# Altium PCB ADC.PcbDoc
Units mm, origin at the board's own origin, x right, y up, seen from the top; angles counter-clockwise.
Board outline 76.2 x 30.48 mm, 2 copper layers (Top Layer, Bottom Layer); 55 components, 39 nets, 152 pads, 22 vias.
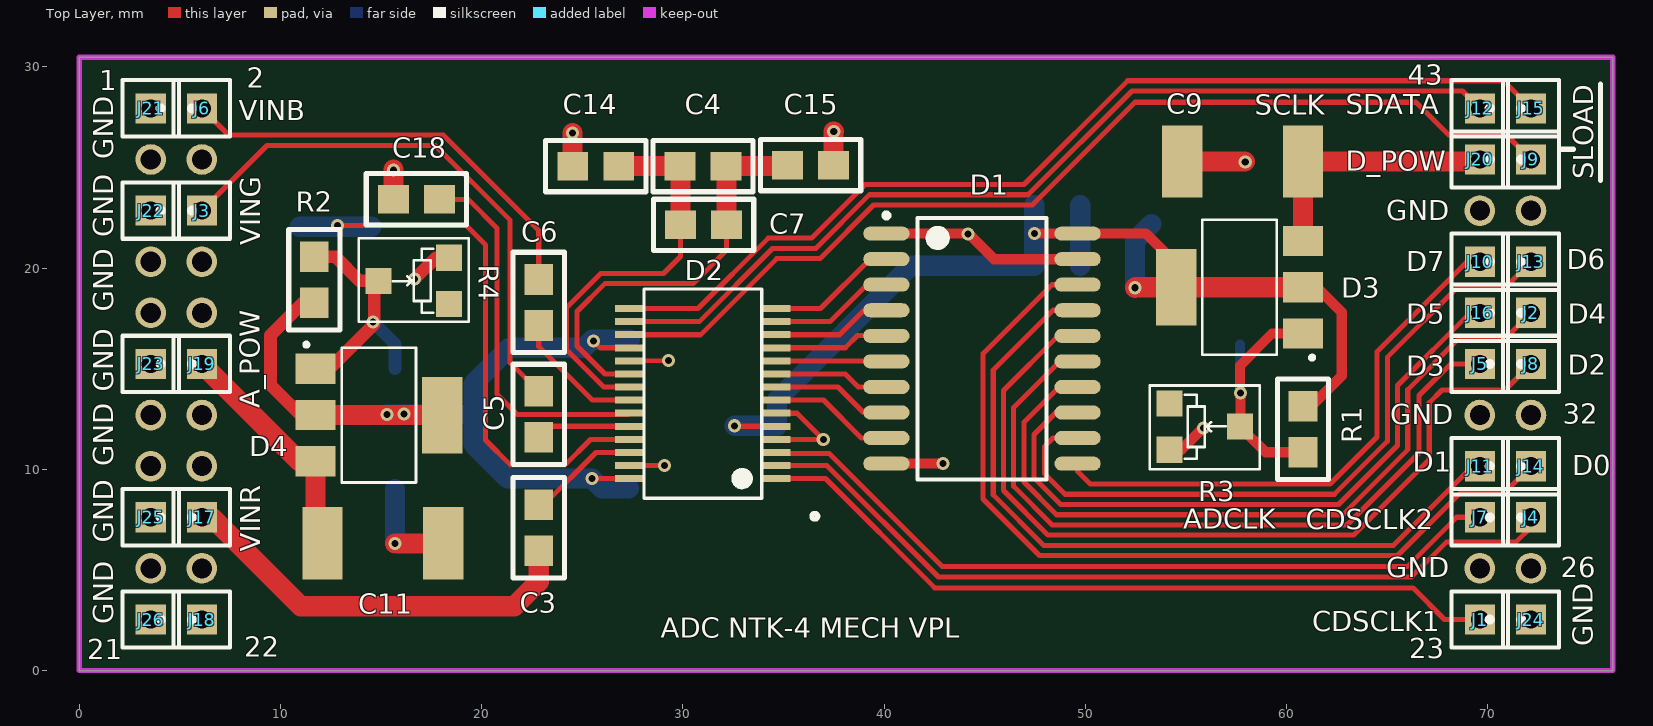
[diagram p0: Top Layer view]
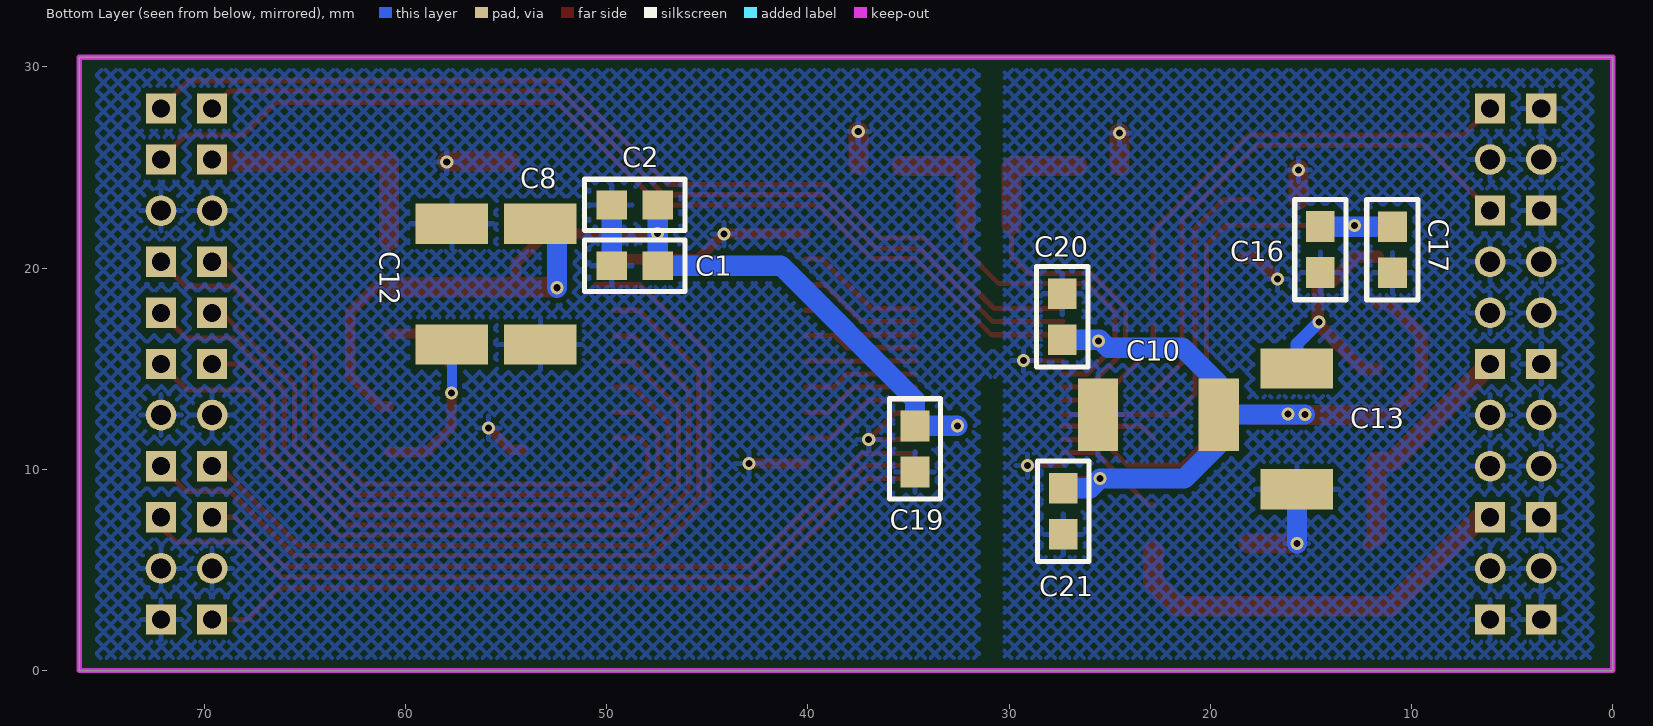
[diagram p1: Bottom Layer view, seen from below]

## Layer stack, top to bottom
Top Solder: solder mask 0.0102, Solder Resist, Dk 3.5
Top Layer: signal copper 0.0356
Dielectric 1: dielectric 0.32, FR-4, Dk 4.8
Bottom Layer: signal copper 0.0356
Bottom Solder: solder mask 0.0102, Solder Resist, Dk 3.5

## Board outline
0,0 76.2,0 76.2,30.48 0,30.48

## Design rules (kind name [scope] priority, off if disabled: settings)
Clearance [All] p1: gap=0.254
PolygonConnect [All] p1: connectstyle=Relief reliefconductorwidth=0.254 reliefentries=4 polygonreliefangle="90 Angle" airgapwidth=0.254
RoutingVias [All] p1: holewidth=0.711 width=1.27 viastyle="Through Hole" minholewidth=0.711 minwidth=1.27 maxholewidth=0.711 maxwidth=1.27
SolderMaskExpansion [All] p1: expansion=0.102
Width [All] p1: maxlimit=1 minlimit=0.127 preferedwidth=0.254
29 further rules are at their usual default settings.

## Components (designator, comment, footprint, x,y, rotation, side; value= is the part's Value field where it differs from the comment)
C1 "0,1" CAP_SMALL 51.105,18.847 r180 bottom
C2 "0,01" CAP_SMALL 51.105,21.869 r180 bottom
C3 "0,1" CAP_SMALL 24.105,4.597 r90 top
C4 "10,0" CAP_SMALL 33.503,26.34 r180 top
C5 "0,1" CAP_SMALL 21.565,15.24 r270 top
C6 "0,1" CAP_SMALL 21.565,20.803 r270 top
C7 "0,1" CAP_SMALL 33.528,23.419 r180 top
C8 "100,0" Cap_BIG 51.384,23.292 r0 bottom
C9 "10,0" Cap_BIG 61.9,23.393 r90 top
C10 "100,0" Cap_BIG 18.491,10.82 r90 bottom
C11 "10,0" Cap_BIG 10.998,8.23 r270 top
C12 "10,0" Cap_BIG 59.588,15.113 r180 bottom
C13 "10,0" Cap_BIG 13.792,16.104 r0 bottom
C14 "0,1" CAP_SMALL 28.169,26.34 r180 top
C15 "0,1" CAP_SMALL 33.833,23.851 r0 top
C16 "1,0" CAP_SMALL 13.259,18.415 r90 bottom
C17 "0,1" CAP_SMALL 12.217,23.419 r270 bottom
C18 "0,1" CAP_SMALL 14.249,22.149 r0 top
C19 "0,1" CAP_SMALL 33.401,8.509 r90 bottom
C20 "0,1" CAP_SMALL 28.626,20.091 r270 bottom
C21 "0,1" CAP_SMALL 26.035,5.41 r90 bottom
D1 "74AC541" 20S_M 44.856,16.002 r0 top
D2 "AD9826" SSOP-28 30.988,13.767 r90 top
D3 "LM1117-ADJ" SOT230P700X180-4N 57.658,19.05 r90 top
D4 "LM1117-ADJ" SOT230P700X180-4N 14.884,12.7 r270 top
J1 "CDSCLK1" PIN1 69.596,2.54 r270 top
J2 "D4" PIN1 72.136,17.78 r90 top
J3 "VING" PIN1 6.096,22.86 r90 top
J4 "CDSCLK2" PIN1 72.136,7.62 r90 top
J5 "D3" PIN1 69.596,15.24 r270 top
J6 "VINB" PIN1 6.096,27.94 r90 top
J7 "ADCCLK" PIN1 69.596,7.62 r270 top
J8 "D2" PIN1 72.136,15.24 r90 top
J9 "SLOAD" PIN1 72.136,25.4 r90 top
J10 "MSB (D7)" PIN1 69.596,20.32 r270 top
J11 "D1" PIN1 69.596,10.16 r270 top
J12 "SCLK" PIN1 69.596,27.94 r270 top
J13 "D6" PIN1 72.136,20.32 r90 top
J14 "(LSB) D0" PIN1 72.136,10.16 r90 top
J15 "SDATA" PIN1 72.136,27.94 r90 top
J16 "D5" PIN1 69.596,17.78 r270 top
J17 "VINR" PIN1 6.096,7.62 r90 top
J18 "GND" PIN1 6.096,2.54 r90 top
J19 "A_POW" PIN1 6.096,15.24 r90 top
J20 "D_POW" PIN1 69.596,25.4 r270 top
J21 "GND" PIN1 3.556,27.94 r270 top
J22 "GND" PIN1 3.556,22.86 r270 top
J23 "GND" PIN1 3.556,15.24 r270 top
J24 "GND" PIN1 72.136,2.54 r90 top
J25 "GND" PIN1 3.556,7.62 r270 top
J26 "GND" PIN1 3.556,2.54 r270 top
R1 "121" RES 62.052,14.478 r180 top
R2 "121" RES 10.439,16.942 r0 top
R3 "1k" PODSR_RES 56.007,12.141 r270 top
R4 "1k" PODSR_RES 16.535,19.355 r90 top

## Footprints (in the part's own frame and the unit in brackets; to place one, negate y for a bottom-side part, rotate by r counter-clockwise, add the part's x,y. Pads: shape width x height; smd on the part's side, far side on the other; paste and mask are expansions set on the pad)
20S_M [mm] "20-Pin Small Outline Integrated Circuit 1.27 mm Pitch, IPC Low Density"
  oval 2.3x0.7 smd: 1(-4.75,5.715) 2(-4.75,4.445) 3(-4.75,3.175) 4(-4.75,1.905) 5(-4.75,0.635) 6(-4.75,-0.635) 7(-4.75,-1.905) 8(-4.75,-3.175) 9(-4.75,-4.445) 10(-4.75,-5.715) 11(4.75,-5.715) 12(4.75,-4.445) 13(4.75,-3.175) 14(4.75,-1.905) 15(4.75,-0.635) 16(4.75,0.635) 17(4.75,1.905) 18(4.75,3.175) 19(4.75,4.445) 20(4.75,5.715)
  silkscreen extent -4.87,-6.5 3.2,6.74, body extent -3.8,-6.5 3.8,6.5, height 2.67
Cap_BIG [mm] "FROM_MAX"
  rect 3.6x2 smd: 1(1.905,7.092) 2(1.905,1.092)
  body extent 0,-0.01 3.81,8.19, height 2.54
CAP_SMALL [mil] "FROM_MAX"
  rect 60x55.98 smd: 1(53.71,50) 2(143.71,50)
  silkscreen extent 1,0 197,100, body extent 20,18 178,82, height 100
PIN1 [mm] "Connector; Plug"
  rect 1.5x1.5 hole 0.9: 1(0,0)
  silkscreen extent -1.4,-1.4 1.4,2.18
PODSR_RES [mm] "PODSR_RES"
  rect 1.3x1.3 smd: 1(-1.136,-1.83) 2(0.014,1.67) 3(1.164,-1.83)
  silkscreen extent -2.03,-2.82 2.14,2.64
RES [mil] "FROM_MAX"
  rect 55.98x60 smd: 1(49,52.71) 2(49,142.71)
  silkscreen extent -1,0 99,196, body extent 17,19 81,177, height 100
SOT230P700X180-4N [mm]
  rect 1.5x2 smd: 1(-2.3,-3.15) 2(0,-3.15) 3(2.3,-3.15)
  rect 3.8x2 smd: 4(0,3.15)
  silkscreen extent -3.6,-3.7 3.35,1.85
SSOP-28 [mm]
  rect 0.348x1.397 smd: 1(-4.225,-3.656) 2(-3.575,-3.656) 3(-2.925,-3.656) 4(-2.275,-3.656) 5(-1.625,-3.656) 6(-0.975,-3.656) 7(-0.325,-3.656) 8(0.325,-3.656) 9(0.975,-3.656) 10(1.625,-3.656) 11(2.275,-3.656) 12(2.925,-3.656) 13(3.575,-3.656) 14(4.225,-3.656) 15(4.225,3.656) 16(3.575,3.656) 17(2.925,3.656) 18(2.275,3.656) 19(1.625,3.656) 20(0.975,3.656) 21(0.325,3.656) 22(-0.325,3.656) 23(-0.975,3.656) 24(-1.625,3.656) 25(-2.275,3.656) 26(-2.925,3.656) 27(-3.575,3.656) 28(-4.225,3.656)
  silkscreen extent -5.2,-2.93 5.2,2.93

## Part data
C1 C2 C3 C4 C5 C6 C7 C14 C15 C16 C17 C18 C19 C20 C21: library part CAP_SMALL
C8 C9 C10 C11 C12 C13: library part CAP_BIG
J1 J2 J3 J4 J5 J6 J7 J8 J9 J10 J11 J12 J13 J14 J15 J16 J17 J18 J19 J20 J21 J22 J23 J24 J25 J26: library part Socket, "Socket"
R1 R2: library part RES
R3 R4: library part RES_PODSTR

## Free pads (board coordinates)
  round 1.524 hole 1: 0(3.556,5.08) 0(3.556,10.16) 0(3.556,12.7) 0(3.556,17.78) 0(3.556,20.32) 0(3.556,25.4) 0(6.096,5.08) 0(6.096,10.16) 0(6.096,12.7) 0(6.096,17.78) 0(6.096,20.32) 0(6.096,25.4) 0(69.596,5.08) 0(69.596,12.7) 0(69.596,22.86) 0(72.136,5.08) 0(72.136,12.7) 0(72.136,22.86)

## Via types
v1: diameter 0.65, hole 0.35, Top Layer to Bottom Layer, 22 vias

## Nets (pads, with @x,y where several pads share a name; then routed paths per layer and width w, separated by ;. In a path a pad name is that pad's centre, name@x,y a point inside that pad or via, vN(x,y) a via of type N, cw(c..) or ccw(c..) an arc to the next point about the centre after c; other vN are vias at no path point)
"(LSB) D0": D1.2 D2.14 | length 6.5
  Top Layer w0.254: D2.14 36.839,17.992 39.294,20.447 D1.2
"(LSB) D0_BUF": D1.18 J14.1 | length 44.5
  Top Layer w0.254: D1.18@50.546,19.177 D1.18 48.336,19.177 44.907,15.748 44.907,8.527 47.719,5.715 65.507,5.715 68.707,8.915 70.891,8.915 J14.1
A_POW: C11.2 D4.3 J19.1 | length 11.9
  Top Layer w0.635: C11.2@11.734,6.681 C11.2
  Top Layer w1: J19.1 10.936,10.4 D4.3 C11.2@11.734,6.681
ADCCLK: D2.3 J7.1 | length 38.3
  Top Layer w0.254: D2.3 34.7,10.786 37.271,10.786 42.875,5.182 66.007,5.182 68.446,7.62 J7.1
AVDD: C10.2 C20.2 C21.2 D2.18 D2.28 D4.2 D4.4 R2.1 | length 42.9
  Top Layer w0.254: v1@25.4,9.525 25.417,9.542 v1(25.476,9.542) D2.28 ; v1(25.552,16.383) 25.894,16.042 D2.18
  Top Layer w0.635: R2.1 11.118,18.281 9.5,16.662 9.5,14.199 10.998,12.7 D4.2
  Top Layer w1: D4.2 D4.4
  Bottom Layer w1: v1(15.291,12.725) C10.2 ; C21.2 25.958,9.06 v1(25.476,9.542) 21.294,9.542 19.583,11.252 C10.2 ; C20.2 25.48,16.441 25.081,16.042 21.376,16.042 19.583,14.249 C10.2
  other v1: 16.129,12.751
CAPB: C4.1 C7.1 C15.1 D2.20 | length 21
  Top Layer w0.254: D2.20 26.127,14.742 24.74,16.129 24.74,17.849 26.118,19.228 30.505,19.228 32.164,20.886 C7.1 ; C15.1@35.146,25.07 C15.1
  Top Layer w1: C7.1 32.164,25.044 C4.1 C15.1@35.349,25.07
CAPT: C4.2 C7.2 C14.1 D2.21 | length 20.5
  Top Layer w0.254: D2.21 26.058,14.092 24.206,15.944 24.206,18.034 25.908,19.736 29.032,19.736 29.878,20.581 C7.2
  Top Layer w1: C14.1@26.601,25.07 C4.2 29.878,25.044 C7.2
CDSCLK1: D2.1 J1.1 | length 37.9
  Top Layer w0.254: D2.1 37.078,9.542 42.505,4.115 66.269,4.115 67.843,2.54 J1.1
CDSCLK2: D2.2 J4.1 | length 41.3
  Top Layer w0.254: D2.2 37.147,10.192 42.69,4.648 66.192,4.648 67.945,6.401 71.399,6.401 72.136,7.137 J4.1
CML: C18.2 D2.23 | length 18.7
  Top Layer w0.254: C18.2 19.329,23.419 20.752,21.996 20.752,13.741 21.76,12.733 27.273,12.733 D2.23
D1: D1.3 D2.13 | length 6.2
  Top Layer w0.254: D2.13 37.306,17.342 39.141,19.177 D1.3
D1_BUF: D1.17 J11.1 | length 38.5
  Top Layer w0.254: D1.17 48.387,17.907 45.415,14.935 45.415,8.738 47.93,6.223 65.296,6.223 69.233,10.16 J11.1
D2: D1.4 D2.12 | length 6
  Top Layer w0.254: D2.12 37.774,16.692 38.989,17.907 D1.4
D2_BUF: D1.16 J8.1 | length 42.1
  Top Layer w0.254: D1.16 48.641,16.637 45.923,13.919 45.923,8.948 48.14,6.731 63.322,6.731 67.081,10.49 67.081,13.31 67.716,13.945 70.841,13.945 J8.1
D3: D1.5 D2.11 | length 5.7
  Top Layer w0.254: D2.11 38.064,16.042 38.673,16.652 40.092,16.652 D1.5
D3_BUF: D1.15 J5.1 | length 37
  Top Layer w0.254: D1.15 48.717,15.367 46.431,13.081 46.431,9.158 48.351,7.239 62.992,7.239 66.573,10.82 66.573,13.665 68.148,15.24 J5.1
D4: D1.6 D2.10 | length 5.5
  Top Layer w0.254: D2.10 40.082,15.392 D1.6
D4_BUF: D1.14 J2.1 | length 38.1
  Top Layer w0.254: D1.14 48.692,14.097 46.939,12.344 46.939,9.369 48.561,7.747 62.782,7.747 66.015,10.98 66.015,13.963 68.587,16.535 70.891,16.535 J2.1
D5: D1.7 D2.9 | length 5.7
  Top Layer w0.254: D2.9 38.065,14.742 38.71,14.097 D1.7
D5_BUF: D1.13 J16.1 | length 33.2
  Top Layer w0.254: D1.13 48.539,12.827 47.447,11.735 47.447,9.579 48.771,8.255 62.571,8.255 65.507,11.19 65.507,14.173 69.113,17.78 J16.1
D6: D1.8 D2.8 | length 6
  Top Layer w0.254: D2.8 37.699,14.092 38.964,12.827 D1.8
D6_BUF: D1.12 J13.1 | length 35
  Top Layer w0.254: D1.12 48.387,11.557 47.955,11.125 47.955,9.79 48.982,8.763 62.361,8.763 64.999,11.401 64.999,15.57 68.529,19.101 70.917,19.101 J13.1
D_POW: C9.2 D3.3 J20.1 | length 12.8
  Top Layer w1: D3.3 C9.2 69.494,25.298 J20.1
DRVDD: C1.2 C2.2 C8.2 C19.2 D1.20 D2.5 D3.2 D3.4 R1.1 | length 52.9
  Top Layer w0.254: v1@32.589,12.142 D2.5
  Top Layer w0.508: v1(47.473,21.717) D1.20 53.01,21.717 54.508,20.219 D3.4 ; R1.1 61.221,13.139 62.738,14.656 62.738,17.805 61.493,19.05 D3.2
  Top Layer w1: v1(52.451,19.025) 52.476,19.05 D3.4 D3.2
  Bottom Layer w1: v1(32.563,12.167) 34.664,12.167 C19.2 34.671,13.462 41.326,20.117 C1.2 C2.2 ; v1(52.451,19.025) 52.451,21.361 C8.2
GND: C1.1 C2.1 C8.1 C9.1 C10.1 C11.1 C12.1 C13.1 C14.2 C15.2 C16.1 C17.2 C18.1 C19.1 C20.1 C21.1 D1.1 D1.10 D1.19 D2.4 D2.6 D2.19 D2.27 J18.1 J21.1 J22.1 J23.1 J24.1 J25.1 J26.1 pad.0 R3.3 R4.3 | length 42.1
  Top Layer w0.254: D2.27 v1@29.153,10.192 ; D2.19 v1(29.286,15.418) ; D2.4 v1(36.971,11.492) ; D2.6 35.671,12.792 v1(36.971,11.492) ; v1@36.982,11.481 v1(36.971,11.492)
  Top Layer w0.508: D1.10 v1(42.926,10.287) ; D1.1 44.196,21.717 45.466,20.447 D1.19 ; R3.3 54.767,10.977 v1(55.855,12.065)
  Top Layer w0.635: v1(16.662,19.456) 17.725,20.519 R4.3
  Top Layer w1: C18.1 v1(15.614,24.885) v1@15.621,24.892 ; v1(15.697,6.325) C11.1 ; v1@24.511,26.721 v1(24.518,26.713) C14.2 ; C15.2 37.483,26.79 v1(37.49,26.797) ; C9.1 v1@57.912,25.298
  Bottom Layer w1: v1(15.697,6.325) C13.1 ; C1.1 C2.1
  other v1: 29.083,10.185 44.171,21.692 57.937,25.273
"MSB (D7)": D1.9 D2.7 | length 6.2
  Top Layer w0.254: D2.7 36.977,13.442 38.862,11.557 D1.9
"MSB (D7)_BUF": D1.11 J10.1 | length 27.7
  Top Layer w0.254: D1.11 49.606,9.906 50.241,9.271 62.15,9.271 64.491,11.611 64.491,15.85 68.961,20.32 J10.1
NetC3_2: C3.2 D2.26 | length 5.6
  Top Layer w0.254: C3.2 23.081,8.248 25.675,10.842 D2.26
NetC5_2: C5.2 D2.24 | length 4.7
  Top Layer w0.254: C5.2 23.387,12.142 D2.24
NetC6_2: C6.2 D2.22 | length 6.6
  Top Layer w0.254: C6.2 22.835,16.104 25.496,13.442 D2.22
NetC12_2: C12.2 D3.1 R1.2 R3.2 | length 12.9
  Top Layer w0.508: R1.2 58.951,10.853 R3.2 57.709,12.16 v1(57.709,13.792) 57.683,13.818 57.683,15.164 59.27,16.75 D3.1
  Bottom Layer w0.508: C12.2 57.683,13.818 v1(57.709,13.792)
NetC13_2: C13.2 D4.1 R2.2 R4.2 | length 12.5
  Top Layer w0.635: R2.2 12.733,20.567 13.931,19.369 R4.2 14.656,19.159 14.656,17.221 12.435,15 D4.1
  Bottom Layer w0.635: v1(14.605,17.323) 15.697,16.231 C13.2
OFFSET: C16.2 C17.1 D2.25 | length 29.2
  Top Layer w0.254: v1(12.827,22.123) 19.228,22.123 20.193,21.158 20.193,11.455 21.438,10.211 24.13,10.211 25.411,11.492 D2.25
  Bottom Layer w1: C17.1 14.518,22.055 C16.2
SCLK: D2.16 J12.1 | length 47.4
  Top Layer w0.254: D2.16 30.811,17.342 34.45,20.98 36.594,20.98 39.261,23.647 47.15,23.647 52.306,28.804 68.732,28.804 J12.1
SDATA: D2.15 J15.1 | length 50.1
  Top Layer w0.254: D2.15 30.743,17.992 34.239,21.488 36.384,21.488 39.051,24.155 46.939,24.155 52.095,29.312 70.764,29.312 J15.1
SLOAD: D2.17 J9.1 | length 50.8
  Top Layer w0.254: D2.17 30.879,16.692 34.66,20.472 36.805,20.472 39.472,23.139 47.36,23.139 52.465,28.245 66.421,28.245 68.047,26.619 70.917,26.619 J9.1
VINB: C6.1 J6.1 | length 21.7
  Top Layer w0.254: J6.1 7.417,26.619 18.092,26.619 22.835,21.877 C6.1
VING: C5.1 J3.1 | length 27.3
  Top Layer w0.254: J3.1 9.331,26.095 17.695,26.095 21.412,22.377 21.412,15.298 C5.1
VINR: C3.1 J17.1 | length 20.6
  Top Layer w1: J17.1 6.579,7.62 10.998,3.2 21.615,3.2 22.835,4.42 C3.1
pads on no net: R3.1 R4.1

## Polygon pours and split planes (outlines as drawn)
GND on Bottom Layer "Top Layer-No Net" (hatched 45Degree grid 0.508 track 0.203, remove dead copper, pour order 14): 1.016,0.635 30.226,0.635 30.226,14.605 31.496,14.605 31.496,0.635 75.311,0.635 75.311,29.845 31.496,29.845 31.496,15.875 30.226,15.875 30.226,29.845 1.016,29.845 1.016,0.635

## Keep-outs
Keep-Out Layer:
  the board outline again, w0.254

## Silkscreen, mask and mechanical layers (free items; w line width, h text height)
Top Overlay:
  circle w0.254: c32.944,9.55 r0.284
  circle w0.254: c32.918,9.55 r0.137
  circle w0.254: c36.551,7.671 r0.144
  lines w0.254: 73.584,25.908 74.244,25.908 ; 75.59,24.359 75.59,29.159
  text "43" at 66.015,29.108 h1
  text "2" at 8.331,28.956 h1
  text "1" at 0.991,28.829 h1
  text "SDATA" at 62.941,27.635 h1
  text "SCLK" at 58.42,27.61 h1
  text "VINB" at 7.925,27.356 h1
  text "GND" at 1.702,25.4 h1 r90
  text "SLOAD" at 75.235,24.409 h1 r90
  text "GND" at 64.941,22.377 h1
  text "GND" at 1.702,21.539 h1 r90
  text "VING" at 8.992,21.133 h1 r90
  text "D6" at 73.914,19.939 h1
  text "D7" at 65.94,19.837 h1
  text "GND" at 1.702,17.831 h1 r90
  text "D5" at 65.94,17.247 h1
  text "D4" at 73.965,17.247 h1
  text "D2" at 73.965,14.707 h1
  text "D3" at 65.94,14.656 h1
  text "GND" at 1.702,13.868 h1 r90
  text "32" at 73.711,12.268 h1
  text "GND" at 65.151,12.243 h1
  text "GND" at 1.702,10.16 h1 r90
  text "D1" at 66.273,9.881 h1
  text "D0" at 74.193,9.703 h1
  text "ADCLK" at 54.864,7.061 h1
  text "CDSCLK2" at 60.942,7.036 h1
  text "GND" at 1.702,6.35 h1 r90
  text "VINR" at 8.992,5.918 h1 r90
  text "GND" at 64.941,4.648 h1
  text "26" at 73.609,4.648 h1
  text "GND" at 1.702,2.311 h1 r90
  text "CDSCLK1" at 61.275,1.956 h1
  text "ADC NTK-4 MECH VPL" at 28.905,1.626 h1
  text "GND" at 75.209,1.219 h1 r90
  text "22" at 8.204,0.686 h1
  text "23" at 66.091,0.61 h1
  text "21" at 0.406,0.559 h1